# EAGLE board squall-breakout (EAGLE 6.5.0)
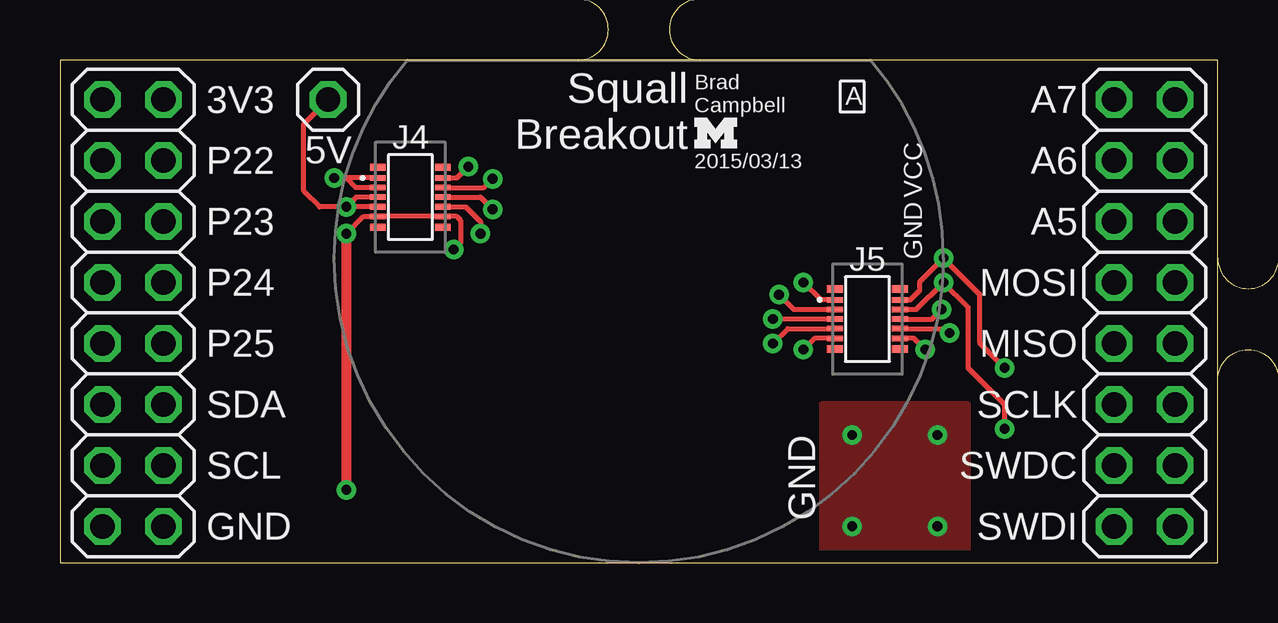
[diagram p0: board, top side]
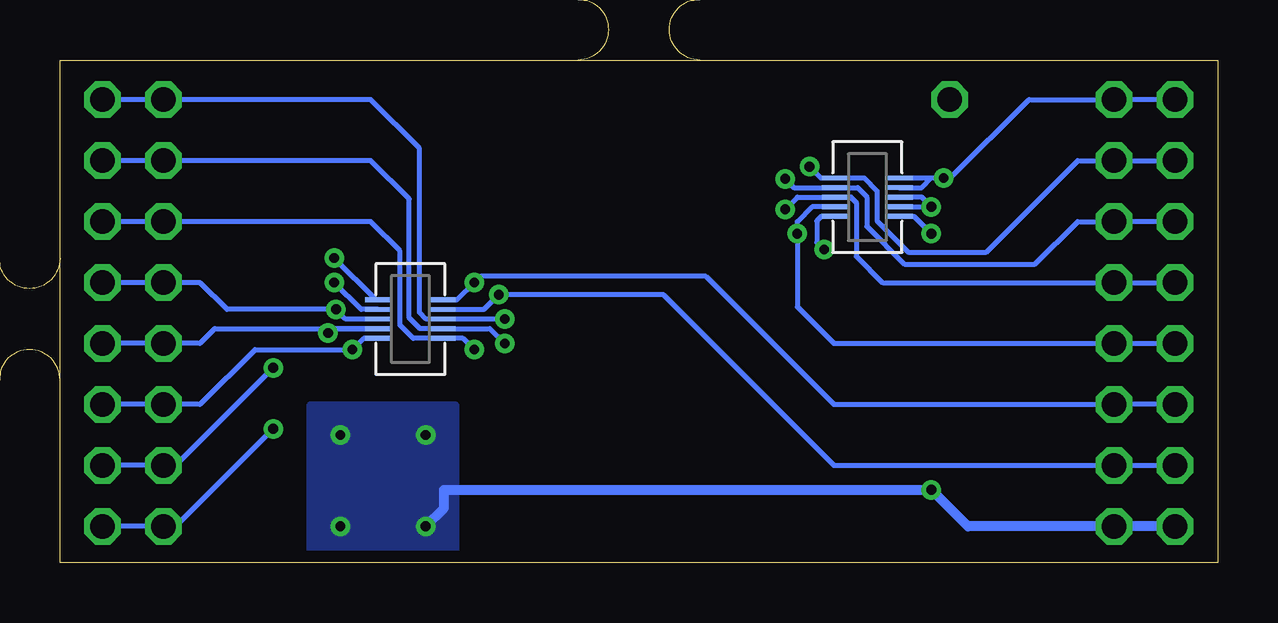
[diagram p1: board, bottom side, seen from below]

Size 48.26 x 20.95 mm. Coordinates in mm from the lower left corner, seen from the top.
Outline: 0,0 48.26,0 48.26,20.95 0,20.95 0,0
Copper layers (1*16): Top 0.0178mm / dielectric 59mil / Bottom 0.0178mm
Design rules "sunstone-2lyr_v1.0.0.3 *": minimum track width 6mil, minimum drill 14mil, track to track 6mil, track to pad 6mil, pad to pad 6mil, via to via 6mil, smd to smd 6mil, copper to edge 20mil, drill to drill 16mil, minimum pad ring 8mil, minimum via ring 8mil, stop-mask expansion 3mil, vias tented up to drill 20mil, thermal gap 10mil
Milling: 10 lines

## Footprints (pad centres in the part's own frame; a part is rotated, then mirrored left to right if it is on the bottom)
SQUALL_HEADER = smd 1.14 x 0.2 bottom: A1 -10.845,3.34; A2 -8.205,3.34; A3 -10.845,2.94; A4 -8.205,2.94; A5 -10.845,2.54; A6 -8.205,2.54; A7 -10.845,2.14; A8 -8.205,2.14; A9 -10.845,1.74; A10 -8.205,1.74; B1 8.205,-1.74; B2 10.845,-1.74; B3 8.205,-2.14; B4 10.845,-2.14; B5 8.205,-2.54; B6 10.845,-2.54; B7 8.205,-2.94; B8 10.845,-2.94; B9 8.205,-3.34; B10 10.845,-3.34
2X08 = drill 1.016 octagon: 1 -8.89,-1.27; 2 -8.89,1.27; 3 -6.35,-1.27; 4 -6.35,1.27; 5 -3.81,-1.27; 6 -3.81,1.27; 7 -1.27,-1.27; 8 -1.27,1.27; 9 1.27,-1.27; 10 1.27,1.27; 11 3.81,-1.27; 12 3.81,1.27; 13 6.35,-1.27; 14 6.35,1.27; 15 8.89,-1.27; 16 8.89,1.27
2X5/SMD/0.4MM = smd 0.66 x 0.23: 1 -1.355,0.8; 2 1.355,0.8; 3 -1.355,0.4; 4 1.355,0.4; 5 -1.355,0; 6 1.355,0; 7 -1.355,-0.4; 8 1.355,-0.4; 9 -1.355,-0.8; 10 1.355,-0.8 | smd 0.66 x 0.3: A -1.355,1.25; B 1.355,1.25; C -1.355,-1.25; D 1.355,-1.25
1X01 = drill 1.016 octagon: 1 0,0

## Placement (x,y rotation side)
J1  SQUALL_HEADER  [SQUALL_HEADER]  24.13,12.7 0 top
J2  [2X08]  3.05,10.41 270 top
J3  [2X08]  45.21,10.41 270 top
J4  HIROSE-DF40C-10DP-0.4V  [2X5/SMD/0.4MM]  14.61,15.24 0 top
J5  HIROSE-DF40C-10DP-0.4V  [2X5/SMD/0.4MM]  33.66,10.16 0 top
J6  [1X01]  11.18,19.3 0 top
LOGO1  UMICH_SOLID_TINY  [UMICH_SOLID_50MIL]  27.33,17.91 0 top

## Library data of the parts
J1 = squall; DIGIKEY: H11617CT-ND
J2 J3 J6 = pinhead
J4 J5 = headers; DIGIKEY: H11616CT-ND; MOUSER: 798-DF40C10DP0.4V51; NEWARK: 68X2585
LOGO1 = logos

## Nets
5V: J1.A5 J1.A7 J4.5 J4.7 J6.1
A5: J1.B9 J3.5 J3.6 J5.9
A6: J1.B7 J3.3 J3.4 J5.7
A7: J1.B5 J3.1 J3.2 J5.5
GND: J1.A9 J1.A10 J2.15 J2.16 J4.9 J4.10
MISO: J1.B8 J3.9 J3.10 J5.8
MOSI: J1.B6 J3.7 J3.8 J5.6
P22: J1.A2 J2.3 J2.4 J4.2
P23: J1.A4 J2.5 J2.6 J4.4
P24: J1.A6 J2.7 J2.8 J4.6
P25: J1.A8 J2.9 J2.10 J4.8
SCL: J1.B3 J2.13 J2.14 J5.3
SCLK: J1.B10 J3.11 J3.12 J5.10
SDA: J1.B1 J2.11 J2.12 J5.1
SWDCLK: J1.B2 J3.13 J3.14 J5.2
SWDIO/!RESET: J1.B4 J3.15 J3.16 J5.4
VCC: J1.A1 J1.A3 J2.1 J2.2 J4.1 J4.3

## Tracks (layer width: path | path; a pad name or v marks a point on that pad's centre or on a via)
5V  (via drill 0.41)
  Top 0.203: J4.7 v11.94,14.84 | v11.94,14.84 10.81,14.84 10.16,15.49 10.16,18.29 J6.1 | J4.5 12.34,15.24 v11.94,14.84
  Bottom 0.203: J1.A7 v11.94,14.84 12.34,15.24 J1.A5
A5  (via drill 0.41)
  Top 0.203: J5.9 31.46,9.36 v30.99,8.89
  Bottom 0.203: J3.6 J3.5 35.31,14.22 34.09,13.01 34.09,9.91 33.54,9.36 J1.B9 31.46,9.36 v30.99,8.89
A6  (via drill 0.41)
  Top 0.203: v29.72,9.14 30.33,9.76 J5.7
  Bottom 0.203: J3.4 J3.3 35.31,16.76 33.71,15.16 33.71,10.21 33.26,9.76 J1.B7 30.33,9.76 v29.72,9.14
A7  (via drill 0.41)
  Top 0.203: J5.5 v29.72,10.16
  Bottom 0.203: J3.2 J3.1 35.31,19.3 33.27,17.27 33.27,10.44 32.99,10.16 J1.B5 v29.72,10.16
GND  (via drill 0.41)
  Top 0.203: v11.94,13.72 12.66,14.44 J4.9 J4.10 16.52,14.44 16.71,14.25 16.71,13.36 v16.41,13.06
  Top 0.406: v11.94,3.05 v11.94,13.72
  Bottom 0.203: J1.A9 12.66,14.44 v11.94,13.72 | J1.A10 16.52,14.44 16.71,14.25 16.71,13.36 v16.41,13.06
  Bottom 0.406: J2.15 J2.16 10.41,1.52 v11.94,3.05 32.26,3.05 32.26,2.29 v33.02,1.52
  other vias: 33.02,5.33 36.58,5.33 36.58,1.52
  pour Bottom: 37.85,0.51 37.85,6.6 31.75,6.6 31.75,0.51
  pour Top: 37.85,0.51 37.85,6.6 31.75,6.6 31.75,0.51
MISO  (via drill 0.41)
  Top 0.203: J5.8 36.9,9.76 v37.08,9.58
  Bottom 0.203: J3.10 J3.9 42.42,9.14 41.8,9.76 J1.B8 36.9,9.76 v37.08,9.58
MOSI  (via drill 0.41)
  Top 0.203: J5.6 36.35,10.16 v36.75,10.57
  Bottom 0.203: J3.8 J3.7 42.42,11.68 41.3,10.57 v36.75,10.57 36.35,10.16 J1.B6
P22  (via drill 0.41)
  Top 0.203: J4.2 16.55,16.04 v17.02,16.51
  Bottom 0.203: J2.3 J2.4 5.84,16.76 9.65,12.95 12.9,12.95 14.2,14.25 14.2,15.49 14.74,16.04 J1.A2 16.55,16.04 v17.02,16.51
P23  (via drill 0.41)
  Top 0.203: J4.4 17.67,15.64 v18.03,16
  Bottom 0.203: J2.5 J2.6 5.84,14.22 7.62,12.45 13.06,12.45 14.63,14.02 14.63,15.27 15.01,15.64 J1.A4 17.67,15.64 v18.03,16
P24  (via drill 0.41)
  Top 0.203: J4.6 17.53,15.24 v18.03,14.73
  Bottom 0.203: J2.7 J2.8 13.97,11.68 15.06,12.78 15.06,15.01 15.29,15.24 J1.A6 17.53,15.24 v18.03,14.73
P25  (via drill 0.41)
  Top 0.203: J4.8 16.91,14.84 17.53,14.22 v17.53,13.72
  Bottom 0.203: J1.A8 16.91,14.84 17.53,14.22 v17.53,13.72 17.53,10.67 16,9.14 J2.10 J2.9
SCL  (via drill 0.41)
  Top 0.203: v29.97,11.18 30.59,10.56 J5.3
  Bottom 0.203: J2.13 J2.14 16,4.06 23.11,11.18 v29.97,11.18 30.59,10.56 J1.B3
SCLK  (via drill 0.41)
  Top 0.203: v36.07,8.89 35.6,9.36 J5.10
  Bottom 0.203: J3.12 J3.11 42.42,6.6 40.13,8.89 v36.07,8.89 35.6,9.36 J1.B10
SDA  (via drill 0.41)
  Top 0.203: J5.1 31.71,10.96 v30.99,11.68
  Bottom 0.203: J1.B1 31.71,10.96 v30.99,11.68 30.73,11.94 21.34,11.94 16,6.6 J2.12 J2.11
SWDCLK  (via drill 0.41)
  Top 0.203: v39.37,8.13 38.35,9.14 38.35,11.18 v36.83,12.7 35.84,11.71 35.84,11.35 35.45,10.96 J5.2
  Bottom 0.203: J3.14 J3.13 43.43,4.06 v39.37,8.13 | J1.B2 35.09,10.96 v36.83,12.7
SWDIO/!RESET  (via drill 0.41)
  Top 0.203: v39.37,5.59 39.37,6.6 37.85,8.13 37.85,10.67 v36.83,11.68 35.71,10.56 J5.4
  Bottom 0.203: J1.B4 35.71,10.56 v36.83,11.68 | J3.16 J3.15 43.43,1.52 v39.37,5.59
VCC  (via drill 0.41)
  Top 0.203: J4.1 v11.43,16.04 11.94,16.04 12.34,15.64 J4.3
  Bottom 0.203: J1.A1 11.94,16.04 | 11.94,16.04 v11.43,16.04 11.14,16.04 7.87,19.3 J2.2 J2.1 | J1.A3 12.34,15.64 11.94,16.04

## Text on the board
tPlace: 3V3 | Brad / Campbell | A | A7 | 5V | P22 | Squall / Breakout | A6 | 2015/03/13 | VCC | P23 | GND | A5 | P24 | MOSI | P25 | MISO | SDA | SCLK | SCL | GND | SWDC | GND | SWDI